# EAGLE board tree-3d-r1-bottom (EAGLE 5.12)
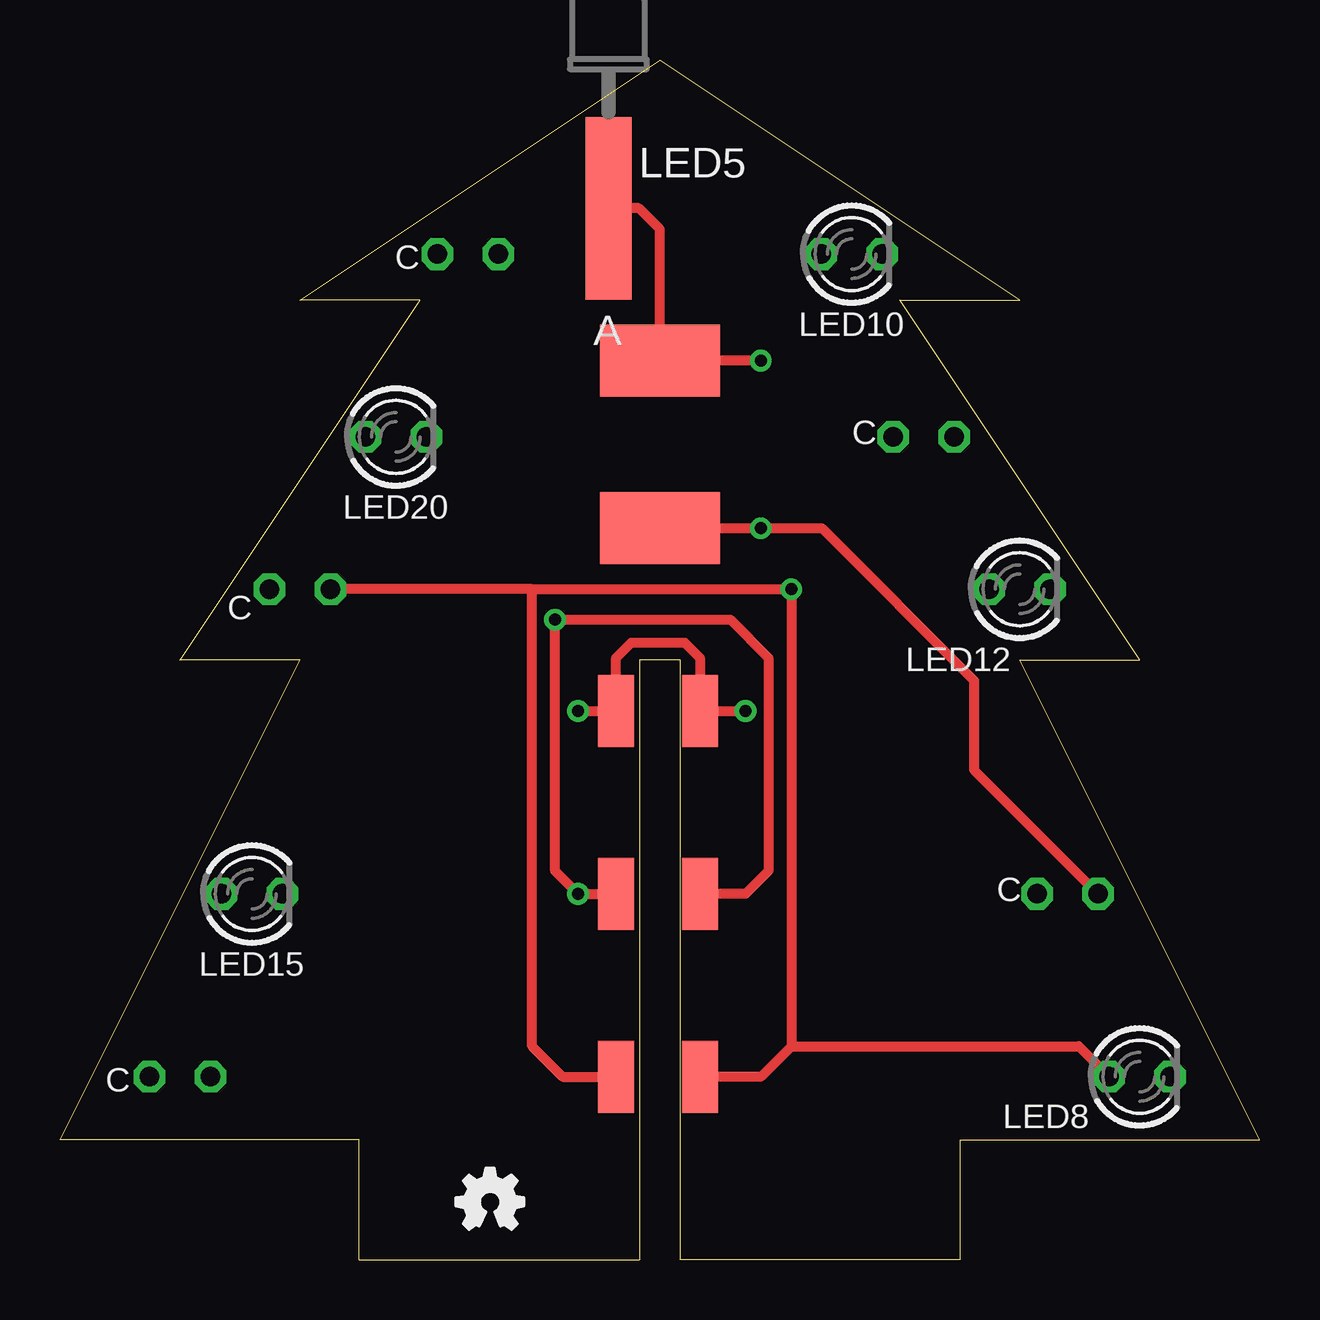
[diagram p0: board, top side]
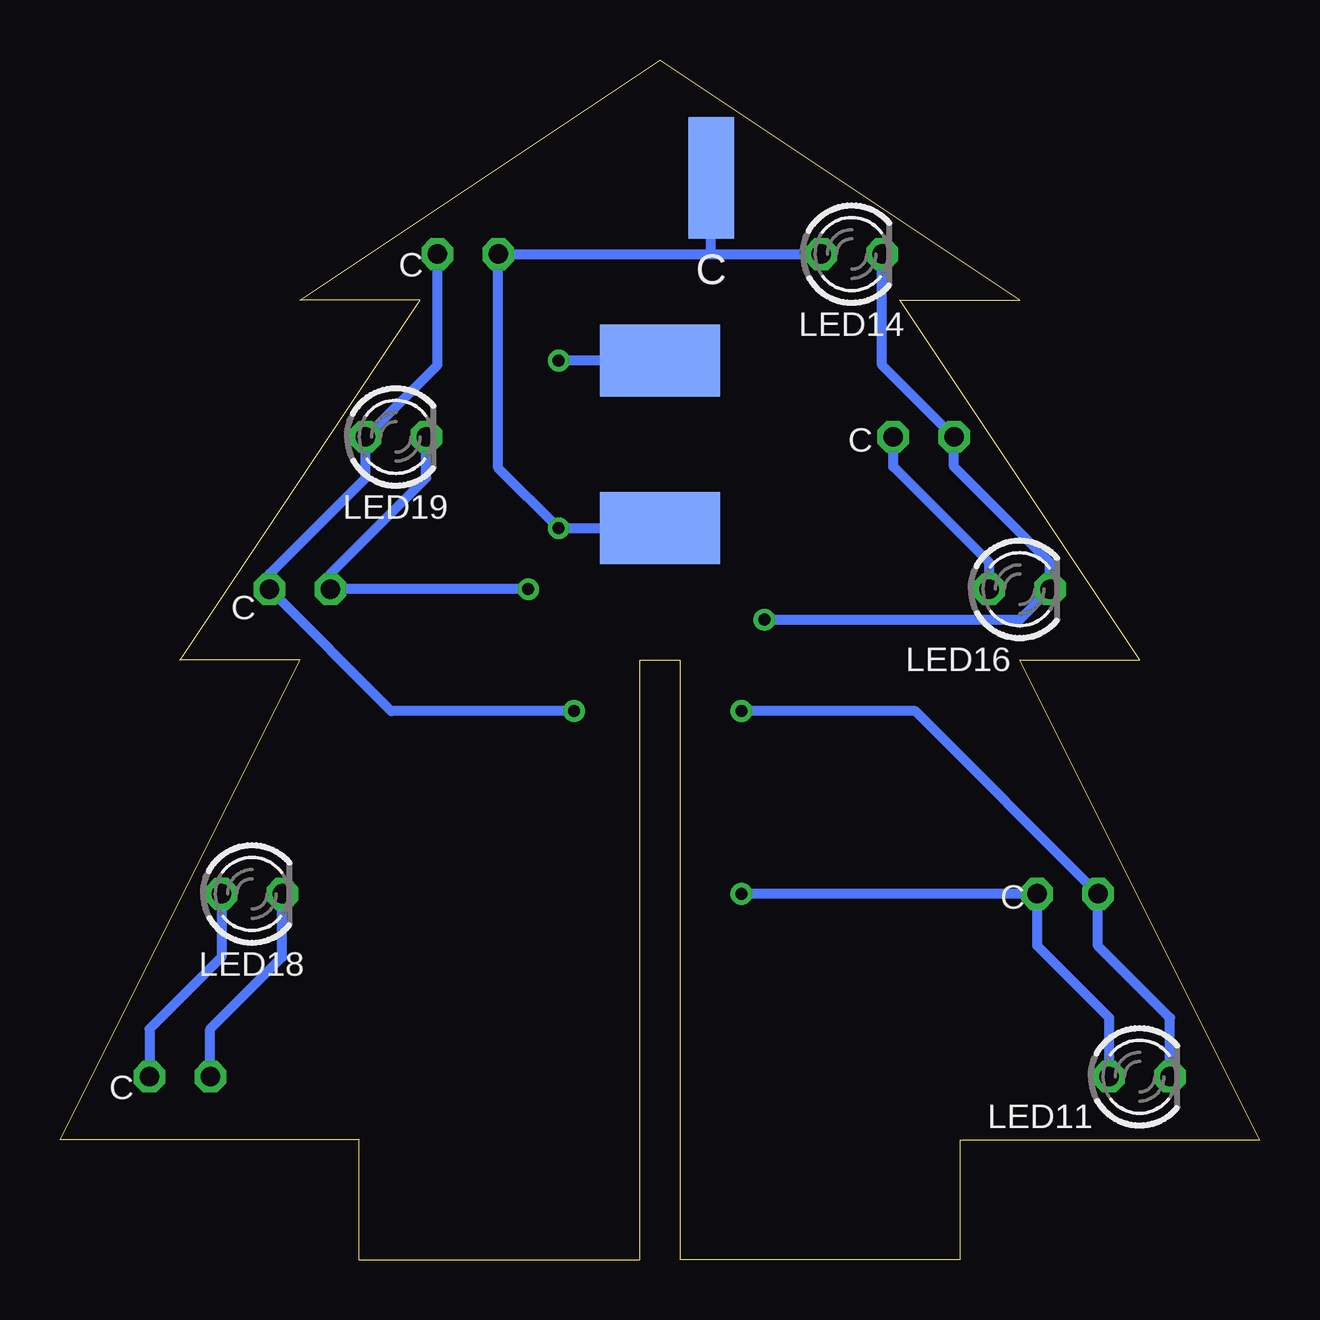
[diagram p1: board, bottom side, seen from below]

Size 50 x 50 mm. Coordinates in mm from the lower left corner, seen from the top.
Outline: 12.46,0 24.15,0 24.15,25 25.85,25 25.85,0 37.54,0 37.54,5 50,5 40,25 45,25 35,40 40,40 25,50 10,40 15,40 5,25 10,25 0,5 12.46,5 12.46,0
Copper layers (1*16): Top 0.035mm / dielectric 1.5mm / Bottom 0.035mm
Design rules "default *": minimum track width 10mil, minimum drill 24mil, track to track 8mil, track to pad 8mil, pad to pad 8mil, via to via 8mil, smd to smd 8mil, copper to edge 10mil, drill to drill 8mil, minimum pad ring 10mil, minimum via ring 8mil, stop-mask expansion 4mil, vias tented up to drill 0mil, thermal gap 10mil

## Footprints (pad centres in the part's own frame; a part is rotated, then mirrored left to right if it is on the bottom)
LED-3MM-EDGE = smd 1.905 x 7.62: A 0,-3.81 | smd 1.905 x 5.08 bottom: K 0,-2.54
LED3MM = drill 0.813 octagon: A -1.27,0; K 1.27,0
PAD-3X5 = smd 5 x 3: P$1 0,0
PAD-1.5X3 = smd 3 x 1.5: P$1 0,0

## Placement (x,y rotation side)
LED5  LED-3MM-EDGE  [LED-3MM-EDGE]  22.86,47.62 0 top
LED8  [LED3MM]  45,7.62 0 top
LED10  [LED3MM]  33,41.91 0 top
LED11  [LED3MM]  5,7.62 0 bottom
LED12  [LED3MM]  40,27.94 0 top
LED14  [LED3MM]  17,41.91 0 bottom
LED15  [LED3MM]  8,15.24 0 top
LED16  [LED3MM]  10,27.94 0 bottom
LED18  [LED3MM]  42,15.24 0 bottom
LED19  [LED3MM]  36,34.29 0 bottom
LED20  [LED3MM]  14,34.29 0 top
LOGO1  OSHW_LOGO_FILLX0100-NT  [OSHW_FILLX100_NOTEXT]  16.51,1.27 0 top
X1  PAD-3X5  [PAD-3X5]  25,37.47 0 top
X2  PAD-3X5  [PAD-3X5]  25,37.47 0 bottom
X7  PAD-3X5  [PAD-3X5]  25,30.48 0 top
X8  PAD-3X5  [PAD-3X5]  25,30.48 0 bottom
X9  PAD-1.5X3  [PAD-1.5X3]  23.18,22.86 90 top
X10  PAD-1.5X3  [PAD-1.5X3]  26.67,22.86 90 top
X13  PAD-1.5X3  [PAD-1.5X3]  23.18,15.24 90 top
X14  PAD-1.5X3  [PAD-1.5X3]  26.67,15.24 90 top
X19  PAD-1.5X3  [PAD-1.5X3]  23.18,7.62 90 top
X20  PAD-1.5X3  [PAD-1.5X3]  26.67,7.62 90 top

## Library data of the parts
LED5 = rbg-generic-leds
LED8 LED10-LED12 LED14-LED16 LED18-LED20 = led
LOGO1 = ohw-logo
X1 X2 X7-X10 X13 X14 X19 X20 = rbg-generic-pads

## Nets
CHARLIEPLEX0: LED5.A X1.P$1 X2.P$1
CHARLIEPLEX1: LED5.K LED8.K LED10.A LED14.A LED18.A X7.P$1 X8.P$1
CHARLIEPLEX2: LED10.K LED11.K LED12.K LED15.A LED19.A X9.P$1 X10.P$1
CHARLIEPLEX3: LED11.A LED14.K LED15.K LED16.K LED20.A X13.P$1 X14.P$1
CHARLIEPLEX4: LED8.A LED12.A LED16.A LED18.K LED19.K LED20.K X19.P$1 X20.P$1

## Tracks (layer width: path | path; a pad name or v marks a point on that pad's centre or on a via)
CHARLIEPLEX0  (via drill 0.5)
  Top 0.406: LED5.A 24.13,43.81 25,42.95 X2.P$1 v29.21,37.47
  Bottom 0.406: X2.P$1 v29.21,37.47
CHARLIEPLEX1  (via drill 0.5)
  Top 0.406: LED18.A 38.1,20.41 38.1,24.13 31.75,30.48 v29.21,30.48 X7.P$1
  Bottom 0.406: LED8.K 46.27,9.61 43.27,12.61 LED18.A | 22.86,41.91 LED14.A | 22.86,41.91 LED5.K | 22.86,41.91 LED10.A 31.73,33 v29.21,30.48 X7.P$1
CHARLIEPLEX2  (via drill 0.5)
  Top 0.406: v21.59,22.86 X9.P$1 23.18,25.08 23.81,25.72 26.04,25.72 26.67,25.08 X10.P$1 v28.57,22.86
  Bottom 0.406: LED10.K 34.27,37.29 LED19.A 37.27,32.58 41.27,28.58 LED12.K 36.19,22.86 v28.57,22.86 | LED11.K 3.73,10.08 6.73,13.08 LED15.A 14.35,22.86 v21.59,22.86
CHARLIEPLEX3  (via drill 0.5)
  Top 0.406: X14.P$1 28.57,15.24 29.53,16.19 29.53,25.08 27.94,26.67 v20.64,26.67 20.64,16.19 v21.59,15.24 X13.P$1
  Bottom 0.406: LED11.A 6.27,10.08 9.27,13.08 LED15.K v21.59,15.24 | v20.64,26.67 10,26.67 LED16.K 8.73,29.05 12.73,33.05 LED20.A 15.73,37.29 LED14.K
CHARLIEPLEX4  (via drill 0.5)
  Top 0.406: X19.P$1 20.95,7.62 19.68,8.89 19.68,27.94 | 19.68,27.94 LED16.A | 19.68,27.94 v30.48,27.94 30.48,8.89 | X20.P$1 29.21,7.62 30.48,8.89 | 30.48,8.89 42.46,8.89 LED8.A
  Bottom 0.406: LED20.K 15.27,33.05 11.27,29.05 LED16.A | LED19.K 34.73,32.58 38.73,28.58 LED12.A v30.48,27.94 | LED8.A 43.73,9.61 40.73,12.61 LED18.K

## Text on the board
tNames: C | C | C | C | C
bNames: C | C | C | C | C